# Altium PCB Advanced Clock.PcbDoc (part 7 of 7)
Units mil, origin at the board's own origin, x right, y up, seen from the top; angles counter-clockwise.
Board outline 3854 x 3880 mil, 2 copper layers (Top Layer, Bottom Layer); 117 components, 90 nets, 504 pads, 209 vias.
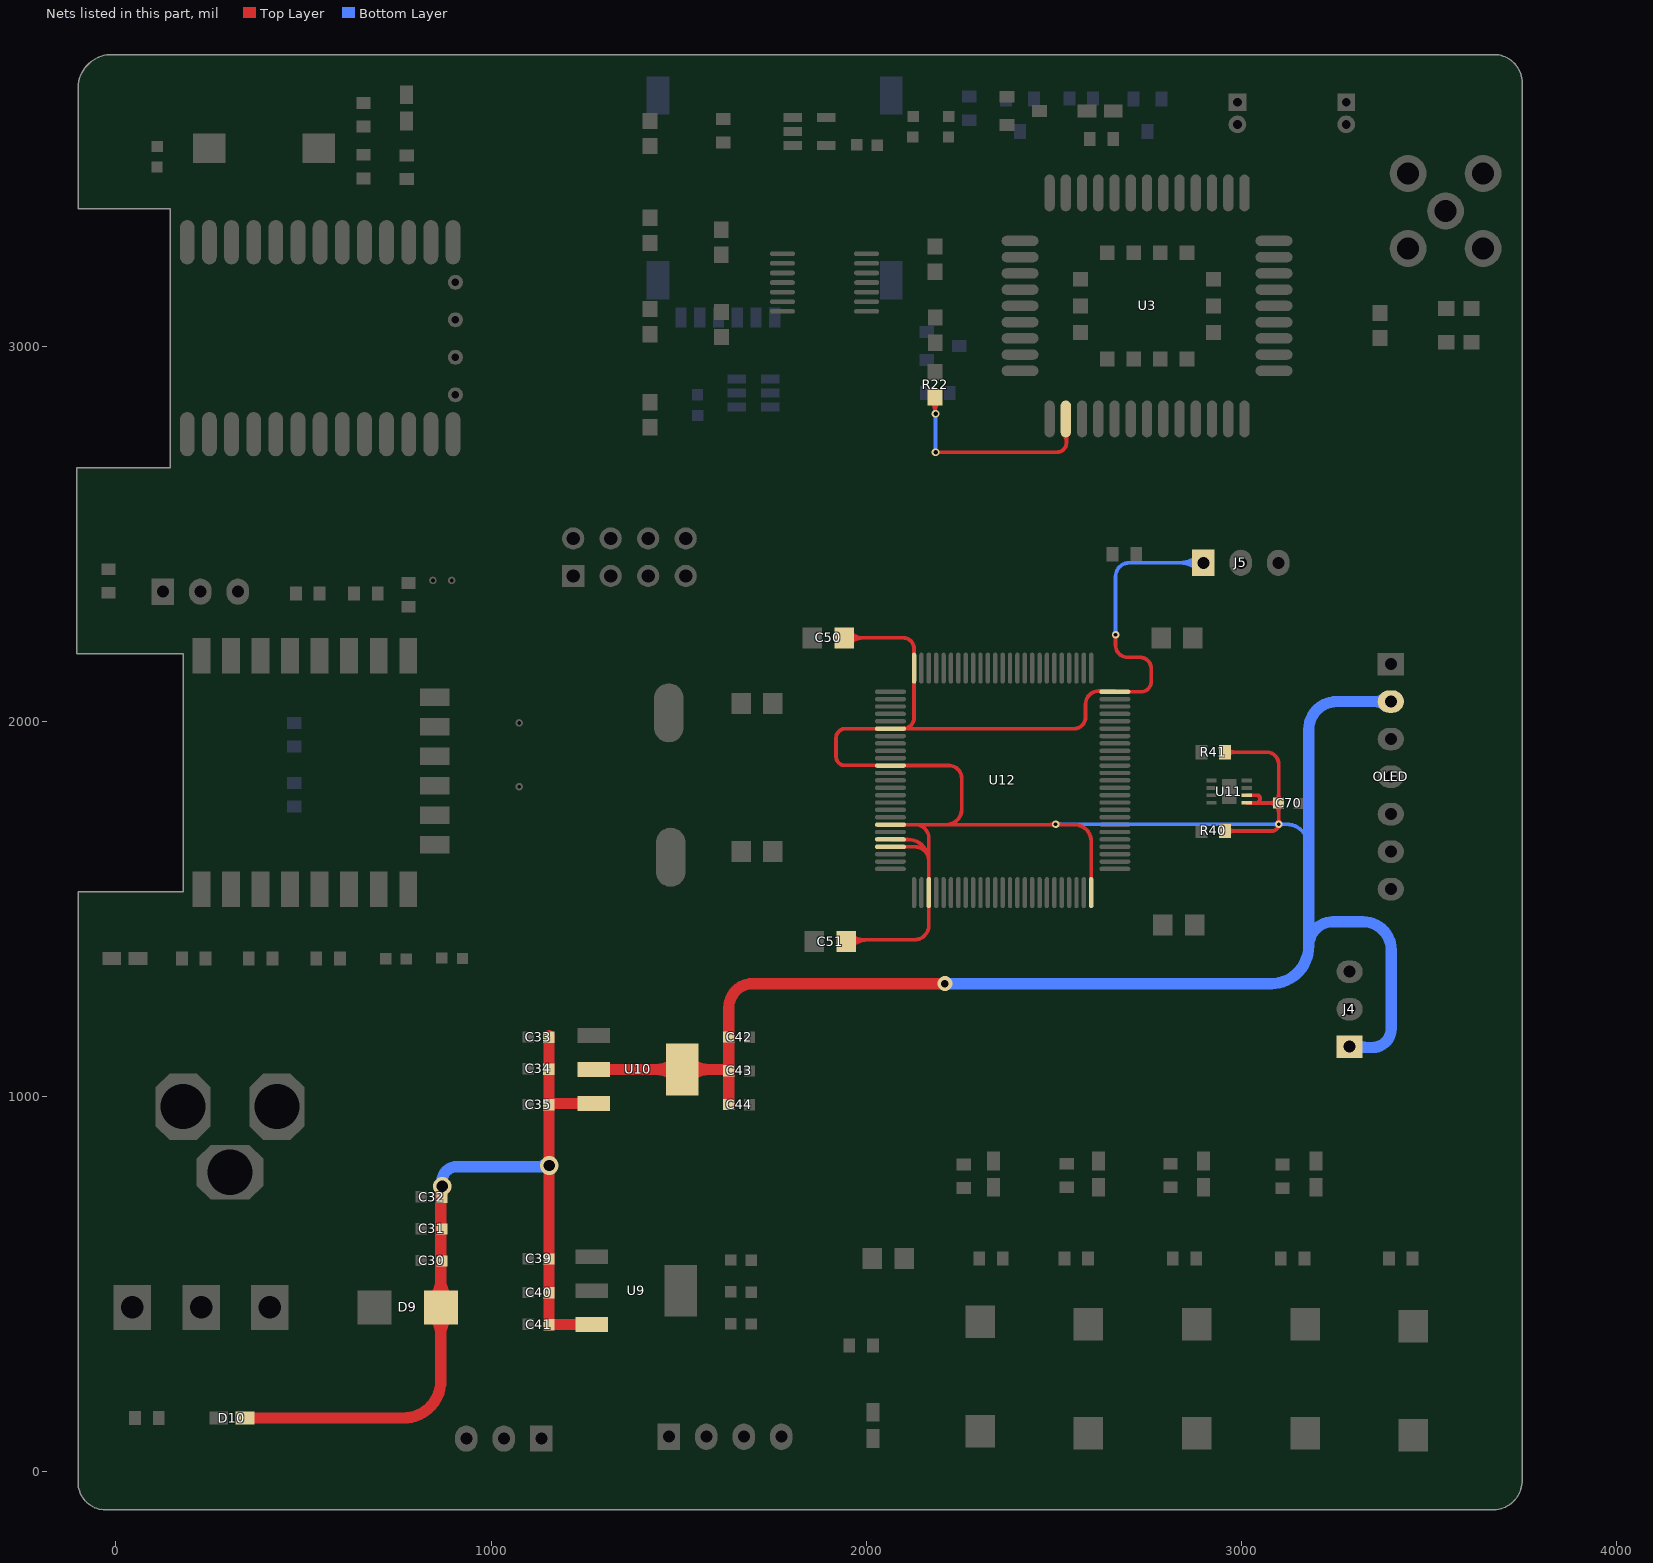
[diagram p7: the nets of this part, all layers, seen from the top]

## Via types
v1: diameter 20, hole 12, Top Layer to Bottom Layer, 133 vias
v2: diameter 20, hole 10, Top Layer to Bottom Layer, 30 vias
v3: diameter 15, hole 7, Top Layer to Bottom Layer, 26 vias
v4: diameter 30, hole 20, Top Layer to Bottom Layer, 11 vias
v5: diameter 138, hole 137.8, Top Layer to Bottom Layer, 4 vias
v6: diameter 50, hole 30, Top Layer to Bottom Layer, 4 vias
v7: diameter 40, hole 20, Top Layer to Bottom Layer, 1 vias

## Nets (pads, with @x,y where several pads share a name; then routed paths per layer and width w, separated by ;. In a path a pad name is that pad's centre, name@x,y a point inside that pad or via, vN(x,y) a via of type N, cw(c..) or ccw(c..) an arc to the next point about the centre after c; other vN are vias at no path point) (continued)
VCC3V3_2: C42.2 C43.2 C44.2 C50.1 C51.1 C70.2 J4.1 J5.1 OLED.2 R40.2 R41.2 U10.2 U10.4 U11.5 U11.6 U12.6 U12.11 U12.19 U12.21 U12.22 U12.28 U12.50 U12.75 U12.100 | length 15293.3
  Top Layer w10: C50.1@1941.5,2222 2099,2222 cw(c2099,2193.22) 2127.78,2193.22 U12.100@2127.78,2141.21 2127.78,2009.03 cw(c2098.54,2009.03) U12.6@2098.54,1979.8 ; C51.1@1951.5,1417 2129,1417 ccw(c2129,1455.15) 2167.15,1455.15 2167.15,1627.85 ; U12.22@2064.79,1664.83 2130.17,1664.83 cw(c2130.17,1627.85) 2167.15,1627.85 ; U12.21@2064.79,1684.52 2110.48,1684.52 cw(c2110.48,1627.85) 2167.15,1627.85 ; U12.19@2064.79,1723.89 2131.11,1723.89 ; U12.11@2064.79,1881.37 2220.84,1881.37 cw(c2220.84,1847.21) 2255,1847.21 2255,1765 cw(c2213.89,1765) 2213.89,1723.89 ; U12.11@2064.79,1882 1943,1882 cw(c1943,1905) 1920,1905 1920,1955 cw(c1944.8,1955) 1944.8,1979.8 U12.6@2064.79,1979.8 U12.6@2098.54,1979.8 ; U12.50@2600.22,1542.79 2600.22,1678.99 ccw(c2555.32,1678.99) 2555.32,1723.89 2131.11,1723.89 ; v2(2665,2230) 2665,2202.25 ccw(c2697.25,2202.25) 2697.25,2170 2730,2170 cw(c2730,2140) 2760,2140 2760,2105 cw(c2733.22,2105) 2733.22,2078.22 U12.75@2663.21,2078.22 ccw(c2661.43,2078.22) 2661.43,2080 2620,2080 ccw(c2620,2045) 2585,2045 2585,2010 cw(c2554.8,2010) 2554.8,1979.8 U12.6@2098.54,1979.8 ; R40.2@2956.99,1707 3082,1707 ccw(c3082,1725) v2(3100,1725) C70.2@3100,1779.43 ; R41.2@2956.99,1917 3068,1917 cw(c3068,1885) 3100,1885 C70.2@3100,1779.43 ; U11.5@3015.14,1782.38 3015.14,1781.79 3040,1781.79 ; U11.6@3015.14,1802.07 3042.93,1802.07 cw(c3042.93,1795) 3050,1795 3050,1791.79 cw(c3040,1791.79) 3040,1781.79 ; C50.1@1949.28,2214.22 cw(c1968.06,2195.44) 1968.06,2222 ; C50.1@1949.28,2214.22 cw(c1968.06,2195.44) 1968.06,2222 ; C50.1@1949.28,2214.22 cw(c1968.06,2195.44) 1968.06,2222 ; C50.1@1949.28,2214.22 cw(c1968.06,2195.44) 1968.06,2222 ; C50.1@1949.28,2214.22 cw(c1968.06,2195.44) 1968.06,2222 ; C50.1@1949.28,2229.78 ccw(c1968.06,2248.56) 1968.06,2222 ; C50.1@1949.28,2229.78 ccw(c1968.06,2248.56) 1968.06,2222 ; C50.1@1949.28,2229.78 ccw(c1968.06,2248.56) 1968.06,2222 ; C50.1@1949.28,2229.78 ccw(c1968.06,2248.56) 1968.06,2222 ; C50.1@1949.28,2229.78 ccw(c1968.06,2248.56) 1968.06,2222 ; C51.1@1954.28,1406.22 cw(c1980.3,1380.2) 1980.3,1417 ; C51.1@1954.28,1406.22 cw(c1980.3,1380.2) 1980.3,1417 ; C51.1@1954.28,1406.22 cw(c1980.3,1380.2) 1980.3,1417 ; C51.1@1954.28,1406.22 cw(c1980.3,1380.2) 1980.3,1417 ; C51.1@1954.28,1406.22 cw(c1980.3,1380.2) 1980.3,1417 ; C50.1@1956.35,2207.15 cw(c1992.2,2171.3) 1992.2,2222 ; C50.1@1956.35,2207.15 cw(c1992.2,2171.3) 1992.2,2222 ; C50.1@1956.35,2207.15 cw(c1992.2,2171.3) 1992.2,2222 ; C50.1@1956.35,2207.15 cw(c1992.2,2171.3) 1992.2,2222 ; C50.1@1956.35,2207.15 cw(c1992.2,2171.3) 1992.2,2222 ; C50.1@1956.35,2236.85 ccw(c1992.2,2272.7) 1992.2,2222 ; C50.1@1956.35,2236.85 ccw(c1992.2,2272.7) 1992.2,2222 ; C50.1@1956.35,2236.85 ccw(c1992.2,2272.7) 1992.2,2222 ; C50.1@1956.35,2236.85 ccw(c1992.2,2272.7) 1992.2,2222 ; C50.1@1956.35,2236.85 ccw(c1992.2,2272.7) 1992.2,2222 ; C51.1@1961.35,1399.15 cw(c2004.44,1356.06) 2004.44,1417 ; C51.1@1961.35,1399.15 cw(c2004.44,1356.06) 2004.44,1417 ; C51.1@1961.35,1399.15 cw(c2004.44,1356.06) 2004.44,1417 ; C51.1@1961.35,1399.15 cw(c2004.44,1356.06) 2004.44,1417 ; C51.1@1961.35,1399.15 cw(c2004.44,1356.06) 2004.44,1417 ; C51.1@1961.35,1428.85 ccw(c1989.96,1457.46) 1989.96,1417 ; C51.1@1961.35,1428.85 ccw(c1989.96,1457.46) 1989.96,1417 ; C51.1@1961.35,1428.85 ccw(c1989.96,1457.46) 1989.96,1417 ; C51.1@1961.35,1428.85 ccw(c1989.96,1457.46) 1989.96,1417 ; C51.1@1961.35,1428.85 ccw(c1989.96,1457.46) 1989.96,1417 ; 2131.11,1723.89 cw(c2131.11,1687.85) 2167.15,1687.85 2167.15,1627.85 ; 2490.25,1723.89 ccw(c2490.25,1739.75) v2@2501.46,1728.54 ; 2490.25,1723.89 ccw(c2490.25,1739.75) v2@2501.46,1728.54 ; 2490.25,1723.89 ccw(c2490.25,1739.75) v2@2501.46,1728.54 ; 2490.25,1723.89 ccw(c2490.25,1739.75) v2@2501.46,1728.54 ; 2490.25,1723.89 ccw(c2490.25,1739.75) v2@2501.46,1728.54 ; 2490.25,1723.89 ccw(c2490.25,1739.75) v2@2501.46,1728.54 ; 2490.25,1723.89 ccw(c2490.25,1739.75) v2@2501.46,1728.54 ; 2490.25,1723.89 ccw(c2490.25,1739.75) v2@2501.46,1728.54 ; v2@2508.54,1728.54 ccw(c2519.75,1739.75) 2519.75,1723.89 ; v2@2508.54,1728.54 ccw(c2519.75,1739.75) 2519.75,1723.89 ; v2@2508.54,1728.54 ccw(c2519.75,1739.75) 2519.75,1723.89 ; v2@2508.54,1728.54 ccw(c2519.75,1739.75) 2519.75,1723.89 ; v2@2508.54,1728.54 ccw(c2519.75,1739.75) 2519.75,1723.89 ; v2@2508.54,1728.54 ccw(c2519.75,1739.75) 2519.75,1723.89 ; v2@2508.54,1728.54 ccw(c2519.75,1739.75) 2519.75,1723.89 ; v2@2508.54,1728.54 ccw(c2519.75,1739.75) 2519.75,1723.89 ; v2@2661.46,2226.46 cw(c2652.93,2217.93) 2665,2217.93 ; v2@2661.46,2226.46 cw(c2652.93,2217.93) 2665,2217.93 ; v2@2661.46,2226.46 cw(c2652.93,2217.93) 2665,2217.93 ; v2@2661.46,2226.46 cw(c2652.93,2217.93) 2665,2217.93 ; v2@2661.46,2226.46 cw(c2652.93,2217.93) 2665,2217.93 ; v2@2661.46,2226.46 cw(c2652.93,2217.93) 2665,2217.93 ; v2@2661.46,2226.46 cw(c2652.93,2217.93) 2665,2217.93 ; v2@2661.46,2226.46 cw(c2652.93,2217.93) 2665,2217.93 ; 2665,2217.93 cw(c2677.07,2217.93) v2@2668.54,2226.46 ; 2665,2217.93 cw(c2677.07,2217.93) v2@2668.54,2226.46 ; 2665,2217.93 cw(c2677.07,2217.93) v2@2668.54,2226.46 ; 2665,2217.93 cw(c2677.07,2217.93) v2@2668.54,2226.46 ; 2665,2217.93 cw(c2677.07,2217.93) v2@2668.54,2226.46 ; 2665,2217.93 cw(c2677.07,2217.93) v2@2668.54,2226.46 ; 2665,2217.93 cw(c2677.07,2217.93) v2@2668.54,2226.46 ; 2665,2217.93 cw(c2677.07,2217.93) v2@2668.54,2226.46 ; R40.2@2964.59,1699.4 cw(c2982.94,1681.05) 2982.94,1707 ; R40.2@2964.59,1699.4 cw(c2982.94,1681.05) 2982.94,1707 ; R40.2@2964.59,1699.4 cw(c2982.94,1681.05) 2982.94,1707 ; R40.2@2964.59,1699.4 cw(c2982.94,1681.05) 2982.94,1707 ; R40.2@2964.59,1699.4 cw(c2982.94,1681.05) 2982.94,1707 ; R40.2@2964.59,1699.4 cw(c2982.94,1681.05) 2982.94,1707 ; R40.2@2964.59,1699.4 cw(c2982.94,1681.05) 2982.94,1707 ; R40.2@2964.59,1699.4 cw(c2982.94,1681.05) 2982.94,1707 ; R40.2@2964.59,1714.6 ccw(c2982.94,1732.95) 2982.94,1707 ; R40.2@2964.59,1714.6 ccw(c2982.94,1732.95) 2982.94,1707 ; R40.2@2964.59,1714.6 ccw(c2982.94,1732.95) 2982.94,1707 ; R40.2@2964.59,1714.6 ccw(c2982.94,1732.95) 2982.94,1707 ; R40.2@2964.59,1714.6 ccw(c2982.94,1732.95) 2982.94,1707 ; R40.2@2964.59,1714.6 ccw(c2982.94,1732.95) 2982.94,1707 ; R40.2@2964.59,1714.6 ccw(c2982.94,1732.95) 2982.94,1707 ; R40.2@2964.59,1714.6 ccw(c2982.94,1732.95) 2982.94,1707 ; R41.2@2964.59,1909.4 cw(c2982.94,1891.05) 2982.94,1917 ; R41.2@2964.59,1909.4 cw(c2982.94,1891.05) 2982.94,1917 ; R41.2@2964.59,1909.4 cw(c2982.94,1891.05) 2982.94,1917 ; R41.2@2964.59,1909.4 cw(c2982.94,1891.05) 2982.94,1917 ; R41.2@2964.59,1909.4 cw(c2982.94,1891.05) 2982.94,1917 ; R41.2@2964.59,1909.4 cw(c2982.94,1891.05) 2982.94,1917 ; R41.2@2964.59,1909.4 cw(c2982.94,1891.05) 2982.94,1917 ; R41.2@2964.59,1909.4 cw(c2982.94,1891.05) 2982.94,1917 ; R41.2@2964.59,1924.6 ccw(c2982.94,1942.95) 2982.94,1917 ; R41.2@2964.59,1924.6 ccw(c2982.94,1942.95) 2982.94,1917 ; R41.2@2964.59,1924.6 ccw(c2982.94,1942.95) 2982.94,1917 ; R41.2@2964.59,1924.6 ccw(c2982.94,1942.95) 2982.94,1917 ; R41.2@2964.59,1924.6 ccw(c2982.94,1942.95) 2982.94,1917 ; R41.2@2964.59,1924.6 ccw(c2982.94,1942.95) 2982.94,1917 ; R41.2@2964.59,1924.6 ccw(c2982.94,1942.95) 2982.94,1917 ; R41.2@2964.59,1924.6 ccw(c2982.94,1942.95) 2982.94,1917 ; 3040,1781.79 3097.65,1781.79 cw(c3097.65,1779.43) C70.2@3100,1779.43 ; 3074.6,1781.79 cw(c3074.6,1756.17) C70.2@3092.72,1774.28 ; 3074.6,1781.79 cw(c3074.6,1756.17) C70.2@3092.72,1774.28 ; 3074.6,1781.79 cw(c3074.6,1756.17) C70.2@3092.72,1774.28 ; 3074.6,1781.79 cw(c3074.6,1756.17) C70.2@3092.72,1774.28 ; 3074.6,1781.79 cw(c3074.6,1756.17) C70.2@3092.72,1774.28 ; 3074.6,1781.79 cw(c3074.6,1756.17) C70.2@3092.72,1774.28 ; 3074.6,1781.79 cw(c3074.6,1756.17) C70.2@3092.72,1774.28 ; 3074.6,1781.79 cw(c3074.6,1756.17) C70.2@3092.72,1774.28 ; 3076.69,1781.79 ccw(c3076.69,1804.45) C70.2@3092.72,1788.43 ; 3076.69,1781.79 ccw(c3076.69,1804.45) C70.2@3092.72,1788.43 ; 3076.69,1781.79 ccw(c3076.69,1804.45) C70.2@3092.72,1788.43 ; 3076.69,1781.79 ccw(c3076.69,1804.45) C70.2@3092.72,1788.43 ; 3076.69,1781.79 ccw(c3076.69,1804.45) C70.2@3092.72,1788.43 ; 3076.69,1781.79 ccw(c3076.69,1804.45) C70.2@3092.72,1788.43 ; 3076.69,1781.79 ccw(c3076.69,1804.45) C70.2@3092.72,1788.43 ; 3076.69,1781.79 ccw(c3076.69,1804.45) C70.2@3092.72,1788.43 ; C70.2@3092.72,1774.28 cw(c3075.13,1756.7) 3100,1756.7 ; C70.2@3092.72,1774.28 cw(c3075.13,1756.7) 3100,1756.7 ; C70.2@3092.72,1774.28 cw(c3075.13,1756.7) 3100,1756.7 ; C70.2@3092.72,1774.28 cw(c3075.13,1756.7) 3100,1756.7 ; C70.2@3092.72,1774.28 cw(c3075.13,1756.7) 3100,1756.7 ; C70.2@3092.72,1774.28 cw(c3075.13,1756.7) 3100,1756.7 ; C70.2@3092.72,1774.28 cw(c3075.13,1756.7) 3100,1756.7 ; C70.2@3092.72,1774.28 cw(c3075.13,1756.7) 3100,1756.7 ; C70.2@3092.72,1788.43 ccw(c3075.13,1806.01) 3100,1806.01 ; C70.2@3092.72,1788.43 ccw(c3075.13,1806.01) 3100,1806.01 ; C70.2@3092.72,1788.43 ccw(c3075.13,1806.01) 3100,1806.01 ; C70.2@3092.72,1788.43 ccw(c3075.13,1806.01) 3100,1806.01 ; C70.2@3092.72,1788.43 ccw(c3075.13,1806.01) 3100,1806.01 ; C70.2@3092.72,1788.43 ccw(c3075.13,1806.01) 3100,1806.01 ; C70.2@3092.72,1788.43 ccw(c3075.13,1806.01) 3100,1806.01 ; C70.2@3092.72,1788.43 ccw(c3075.13,1806.01) 3100,1806.01 ; v2@3096.46,1728.54 ccw(c3087.93,1737.07) 3100,1737.07 ; v2@3096.46,1728.54 ccw(c3087.93,1737.07) 3100,1737.07 ; v2@3096.46,1728.54 ccw(c3087.93,1737.07) 3100,1737.07 ; v2@3096.46,1728.54 ccw(c3087.93,1737.07) 3100,1737.07 ; v2@3096.46,1728.54 ccw(c3087.93,1737.07) 3100,1737.07 ; v2@3096.46,1728.54 ccw(c3087.93,1737.07) 3100,1737.07 ; v2@3096.46,1728.54 ccw(c3087.93,1737.07) 3100,1737.07 ; v2@3096.46,1728.54 ccw(c3087.93,1737.07) 3100,1737.07 ; 3100,1737.07 ccw(c3112.07,1737.07) v2@3103.54,1728.54 ; 3100,1737.07 ccw(c3112.07,1737.07) v2@3103.54,1728.54 ; 3100,1737.07 ccw(c3112.07,1737.07) v2@3103.54,1728.54 ; 3100,1737.07 ccw(c3112.07,1737.07) v2@3103.54,1728.54 ; 3100,1737.07 ccw(c3112.07,1737.07) v2@3103.54,1728.54 ; 3100,1737.07 ccw(c3112.07,1737.07) v2@3103.54,1728.54 ; 3100,1737.07 ccw(c3112.07,1737.07) v2@3103.54,1728.54 ; 3100,1737.07 ccw(c3112.07,1737.07) v2@3103.54,1728.54 ; 3100,1757.73 cw(c3123.42,1757.73) C70.2@3106.86,1774.28 ; 3100,1757.73 cw(c3123.42,1757.73) C70.2@3106.86,1774.28 ; 3100,1757.73 cw(c3123.42,1757.73) C70.2@3106.86,1774.28 ; 3100,1757.73 cw(c3123.42,1757.73) C70.2@3106.86,1774.28 ; 3100,1757.73 cw(c3123.42,1757.73) C70.2@3106.86,1774.28 ; 3100,1757.73 cw(c3123.42,1757.73) C70.2@3106.86,1774.28 ; 3100,1757.73 cw(c3123.42,1757.73) C70.2@3106.86,1774.28 ; 3100,1757.73 cw(c3123.42,1757.73) C70.2@3106.86,1774.28 ; 3100,1804.98 ccw(c3123.42,1804.98) C70.2@3106.86,1788.43 ; 3100,1804.98 ccw(c3123.42,1804.98) C70.2@3106.86,1788.43 ; 3100,1804.98 ccw(c3123.42,1804.98) C70.2@3106.86,1788.43 ; 3100,1804.98 ccw(c3123.42,1804.98) C70.2@3106.86,1788.43 ; 3100,1804.98 ccw(c3123.42,1804.98) C70.2@3106.86,1788.43 ; 3100,1804.98 ccw(c3123.42,1804.98) C70.2@3106.86,1788.43 ; 3100,1804.98 ccw(c3123.42,1804.98) C70.2@3106.86,1788.43 ; 3100,1804.98 ccw(c3123.42,1804.98) C70.2@3106.86,1788.43 ; 2621.3,2080 cw(c2621.3,2071.74) 2627.14,2077.58 ccw(c2621.3,2071.74) 2621.3,2080
  Top Layer w30: U10.2@1274.21,1071.09 1630.91,1071.09 cw(c1630.91,1068) C43.2@1634,1068 ; C44.2@1634,978 C43.2@1634,1068 ; v7(2210,1300) 1698,1300 ccw(c1698,1236) 1634,1236 C42.2@1634,1158 C43.2@1634,1068 ; 1442.09,1071.09 cw(c1442.09,1002.76) U10.4@1490.42,1051.08 ; 1442.09,1071.09 ccw(c1442.09,1139.43) U10.4@1490.42,1091.11 ; 1442.09,1071.09 cw(c1442.09,1002.76) U10.4@1490.42,1051.08 ; 1442.09,1071.09 ccw(c1442.09,1139.43) U10.4@1490.42,1091.11 ; 1442.09,1071.09 cw(c1442.09,1002.76) U10.4@1490.42,1051.08 ; 1442.09,1071.09 ccw(c1442.09,1139.43) U10.4@1490.42,1091.11 ; 1442.09,1071.09 cw(c1442.09,1002.76) U10.4@1490.42,1051.08 ; 1442.09,1071.09 ccw(c1442.09,1139.43) U10.4@1490.42,1091.11 ; U10.4@1530.45,1051.08 cw(c1578.77,1002.76) 1578.77,1071.09 ; U10.4@1530.45,1051.08 cw(c1578.77,1002.76) 1578.77,1071.09 ; U10.4@1530.45,1051.08 cw(c1578.77,1002.76) 1578.77,1071.09 ; U10.4@1530.45,1051.08 cw(c1578.77,1002.76) 1578.77,1071.09 ; U10.4@1530.45,1091.11 ccw(c1578.77,1139.43) 1578.77,1071.09 ; U10.4@1530.45,1091.11 ccw(c1578.77,1139.43) 1578.77,1071.09 ; U10.4@1530.45,1091.11 ccw(c1578.77,1139.43) 1578.77,1071.09 ; U10.4@1530.45,1091.11 ccw(c1578.77,1139.43) 1578.77,1071.09
  Bottom Layer w10: v2(2505,1725) v2(3100,1725) 3120,1725 cw(c3120,1665) 3180,1665 ; v2(2665,2230) 2665,2385 cw(c2702,2385) 2702,2422 J5.1@2899,2422 ; v2@2508.54,1721.46 cw(c2517.07,1712.93) 2517.07,1725 ; v2@2508.54,1721.46 cw(c2517.07,1712.93) 2517.07,1725 ; v2@2508.54,1721.46 cw(c2517.07,1712.93) 2517.07,1725 ; v2@2508.54,1721.46 cw(c2517.07,1712.93) 2517.07,1725 ; v2@2508.54,1721.46 cw(c2517.07,1712.93) 2517.07,1725 ; v2@2508.54,1721.46 cw(c2517.07,1712.93) 2517.07,1725 ; v2@2508.54,1721.46 cw(c2517.07,1712.93) 2517.07,1725 ; v2@2508.54,1721.46 cw(c2517.07,1712.93) 2517.07,1725 ; v2@2508.54,1728.54 ccw(c2517.07,1737.07) 2517.07,1725 ; v2@2508.54,1728.54 ccw(c2517.07,1737.07) 2517.07,1725 ; v2@2508.54,1728.54 ccw(c2517.07,1737.07) 2517.07,1725 ; v2@2508.54,1728.54 ccw(c2517.07,1737.07) 2517.07,1725 ; v2@2508.54,1728.54 ccw(c2517.07,1737.07) 2517.07,1725 ; v2@2508.54,1728.54 ccw(c2517.07,1737.07) 2517.07,1725 ; v2@2508.54,1728.54 ccw(c2517.07,1737.07) 2517.07,1725 ; v2@2508.54,1728.54 ccw(c2517.07,1737.07) 2517.07,1725 ; v2@2661.46,2233.54 ccw(c2652.93,2242.07) 2665,2242.07 ; v2@2661.46,2233.54 ccw(c2652.93,2242.07) 2665,2242.07 ; v2@2661.46,2233.54 ccw(c2652.93,2242.07) 2665,2242.07 ; v2@2661.46,2233.54 ccw(c2652.93,2242.07) 2665,2242.07 ; v2@2661.46,2233.54 ccw(c2652.93,2242.07) 2665,2242.07 ; v2@2661.46,2233.54 ccw(c2652.93,2242.07) 2665,2242.07 ; v2@2661.46,2233.54 ccw(c2652.93,2242.07) 2665,2242.07 ; v2@2661.46,2233.54 ccw(c2652.93,2242.07) 2665,2242.07 ; 2665,2242.07 ccw(c2677.07,2242.07) v2@2668.54,2233.54 ; 2665,2242.07 ccw(c2677.07,2242.07) v2@2668.54,2233.54 ; 2665,2242.07 ccw(c2677.07,2242.07) v2@2668.54,2233.54 ; 2665,2242.07 ccw(c2677.07,2242.07) v2@2668.54,2233.54 ; 2665,2242.07 ccw(c2677.07,2242.07) v2@2668.54,2233.54 ; 2665,2242.07 ccw(c2677.07,2242.07) v2@2668.54,2233.54 ; 2665,2242.07 ccw(c2677.07,2242.07) v2@2668.54,2233.54 ; 2665,2242.07 ccw(c2677.07,2242.07) v2@2668.54,2233.54 ; 2838.64,2422 ccw(c2838.64,2482.36) J5.1@2881.32,2439.68 ; 2838.64,2422 ccw(c2838.64,2482.36) J5.1@2881.32,2439.68 ; 2838.64,2422 ccw(c2838.64,2482.36) J5.1@2881.32,2439.68 ; 2838.64,2422 ccw(c2838.64,2482.36) J5.1@2881.32,2439.68 ; 2838.64,2422 cw(c2838.64,2361.64) J5.1@2881.32,2404.32 ; 2838.64,2422 ccw(c2838.64,2482.36) J5.1@2881.32,2439.68 ; 2838.64,2422 cw(c2838.64,2361.64) J5.1@2881.32,2404.32 ; 2838.64,2422 cw(c2838.64,2361.64) J5.1@2881.32,2404.32 ; 2838.64,2422 cw(c2838.64,2361.64) J5.1@2881.32,2404.32 ; 2838.64,2422 cw(c2838.64,2361.64) J5.1@2881.32,2404.32 ; 2862.79,2422 cw(c2862.79,2385.79) J5.1@2888.39,2411.39 ; 2862.79,2422 cw(c2862.79,2385.79) J5.1@2888.39,2411.39 ; 2862.79,2422 ccw(c2862.79,2458.21) J5.1@2888.39,2432.61 ; 2862.79,2422 cw(c2862.79,2385.79) J5.1@2888.39,2411.39 ; 2862.79,2422 ccw(c2862.79,2458.21) J5.1@2888.39,2432.61 ; 2862.79,2422 ccw(c2862.79,2458.21) J5.1@2888.39,2432.61 ; 2862.79,2422 ccw(c2862.79,2458.21) J5.1@2888.39,2432.61 ; 2862.79,2422 ccw(c2862.79,2458.21) J5.1@2888.39,2432.61 ; 2862.79,2422 cw(c2862.79,2385.79) J5.1@2888.39,2411.39 ; 2862.79,2422 cw(c2862.79,2385.79) J5.1@2888.39,2411.39 ; 3087.93,1725 cw(c3087.93,1712.93) v2@3096.46,1721.46 ; 3087.93,1725 ccw(c3087.93,1737.07) v2@3096.46,1728.54 ; 3087.93,1725 cw(c3087.93,1712.93) v2@3096.46,1721.46 ; 3087.93,1725 ccw(c3087.93,1737.07) v2@3096.46,1728.54 ; 3087.93,1725 cw(c3087.93,1712.93) v2@3096.46,1721.46 ; 3087.93,1725 ccw(c3087.93,1737.07) v2@3096.46,1728.54 ; 3087.93,1725 cw(c3087.93,1712.93) v2@3096.46,1721.46 ; 3087.93,1725 ccw(c3087.93,1737.07) v2@3096.46,1728.54 ; 3087.93,1725 cw(c3087.93,1712.93) v2@3096.46,1721.46 ; 3087.93,1725 ccw(c3087.93,1737.07) v2@3096.46,1728.54 ; 3087.93,1725 cw(c3087.93,1712.93) v2@3096.46,1721.46 ; 3087.93,1725 ccw(c3087.93,1737.07) v2@3096.46,1728.54 ; 3087.93,1725 cw(c3087.93,1712.93) v2@3096.46,1721.46 ; 3087.93,1725 ccw(c3087.93,1737.07) v2@3096.46,1728.54 ; 3087.93,1725 cw(c3087.93,1712.93) v2@3096.46,1721.46 ; 3087.93,1725 ccw(c3087.93,1737.07) v2@3096.46,1728.54 ; v2@3103.54,1721.46 cw(c3112.07,1712.93) 3112.07,1725 ; v2@3103.54,1721.46 cw(c3112.07,1712.93) 3112.07,1725 ; v2@3103.54,1721.46 cw(c3112.07,1712.93) 3112.07,1725 ; v2@3103.54,1721.46 cw(c3112.07,1712.93) 3112.07,1725 ; v2@3103.54,1721.46 cw(c3112.07,1712.93) 3112.07,1725 ; v2@3103.54,1721.46 cw(c3112.07,1712.93) 3112.07,1725 ; v2@3103.54,1721.46 cw(c3112.07,1712.93) 3112.07,1725 ; v2@3103.54,1721.46 cw(c3112.07,1712.93) 3112.07,1725 ; v2@3103.54,1728.54 ccw(c3112.07,1737.07) 3112.07,1725 ; v2@3103.54,1728.54 ccw(c3112.07,1737.07) 3112.07,1725 ; v2@3103.54,1728.54 ccw(c3112.07,1737.07) 3112.07,1725 ; v2@3103.54,1728.54 ccw(c3112.07,1737.07) 3112.07,1725 ; v2@3103.54,1728.54 ccw(c3112.07,1737.07) 3112.07,1725 ; v2@3103.54,1728.54 ccw(c3112.07,1737.07) 3112.07,1725 ; v2@3103.54,1728.54 ccw(c3112.07,1737.07) 3112.07,1725 ; v2@3103.54,1728.54 ccw(c3112.07,1737.07) 3112.07,1725
  Bottom Layer w30: v7(2210,1300) 3080,1300 ccw(c3080,1400) 3180,1400 ; J4.1@3289,1132 ccw(c3291,1132) 3291,1130 3350,1130 ccw(c3350,1180) 3400,1180 3400,1390 ccw(c3325,1390) 3325,1465 3245,1465 ccw(c3245,1400) 3180,1400 ; OLED.2@3399,2052 3255,2052 ccw(c3255,1977) 3180,1977 3180,1665 3180,1400 ; J4.1@3304.61,1121.39 cw(c3325.38,1100.62) 3325.38,1130 ; J4.1@3304.61,1121.39 cw(c3325.38,1100.62) 3325.38,1130 ; J4.1@3304.61,1121.39 cw(c3325.38,1100.62) 3325.38,1130 ; J4.1@3304.61,1121.39 cw(c3325.38,1100.62) 3325.38,1130 ; J4.1@3304.61,1121.39 cw(c3325.38,1100.62) 3325.38,1130 ; J4.1@3304.61,1121.39 cw(c3325.38,1100.62) 3325.38,1130 ; J4.1@3304.61,1121.39 cw(c3325.38,1100.62) 3325.38,1130 ; J4.1@3304.61,1121.39 cw(c3325.38,1100.62) 3325.38,1130 ; J4.1@3304.61,1142.61 ccw(c3335.04,1173.04) 3335.04,1130 ; J4.1@3304.61,1142.61 ccw(c3335.04,1173.04) 3335.04,1130 ; J4.1@3304.61,1142.61 ccw(c3335.04,1173.04) 3335.04,1130 ; J4.1@3304.61,1142.61 ccw(c3335.04,1173.04) 3335.04,1130 ; J4.1@3304.61,1142.61 ccw(c3335.04,1173.04) 3335.04,1130 ; J4.1@3304.61,1142.61 ccw(c3335.04,1173.04) 3335.04,1130 ; J4.1@3304.61,1142.61 ccw(c3335.04,1173.04) 3335.04,1130 ; J4.1@3304.61,1142.61 ccw(c3335.04,1173.04) 3335.04,1130 ; 3357.79,2052 ccw(c3357.79,2088.21) OLED.2@3383.39,2062.61 ; 3357.79,2052 ccw(c3357.79,2088.21) OLED.2@3383.39,2062.61 ; 3357.79,2052 ccw(c3357.79,2088.21) OLED.2@3383.39,2062.61 ; 3357.79,2052 ccw(c3357.79,2088.21) OLED.2@3383.39,2062.61 ; 3357.79,2052 ccw(c3357.79,2088.21) OLED.2@3383.39,2062.61 ; 3357.79,2052 cw(c3357.79,2015.79) OLED.2@3383.39,2041.39 ; 3357.79,2052 cw(c3357.79,2015.79) OLED.2@3383.39,2041.39 ; 3357.79,2052 cw(c3357.79,2015.79) OLED.2@3383.39,2041.39 ; 3357.79,2052 cw(c3357.79,2015.79) OLED.2@3383.39,2041.39 ; 3357.79,2052 cw(c3357.79,2015.79) OLED.2@3383.39,2041.39
VCC5: C30.2 C31.2 C32.2 C33.2 C34.2 C35.2 C39.2 C40.2 C41.2 D9.2 D10.A U9.3 U10.3 | length 4419.6
  Top Layer w30: D10.A@344,141.74 766.17,141.74 ccw(c766.17,241.74) 866.17,241.74 D9.2@866.17,437 866.17,734.83 C32.2@864,737 ; C35.2@1154,977 cw(c1157.54,977) C35.2@1154.21,978.21 ; C41.2@1154.21,390.65 C41.2@1154.21,390.9 ; C33.2@1154.21,1162 C35.2@1154.21,978.21 ; U9.3@1269,390.9 C41.2@1154.21,390.9 ; U10.3@1269.46,985.29 cw(c1269.46,980.54) U10.3@1274.21,980.54 C35.2@1157.54,980.54 ; D9.2@844.76,415.59 cw(c793.07,363.91) 866.17,363.91 ; D9.2@844.76,415.59 cw(c793.07,363.91) 866.17,363.91 ; D9.2@844.76,415.59 cw(c793.07,363.91) 866.17,363.91 ; D9.2@844.76,415.59 cw(c793.07,363.91) 866.17,363.91 ; D9.2@844.76,415.59 cw(c793.07,363.91) 866.17,363.91 ; D9.2@844.76,458.41 ccw(c793.07,510.09) 866.17,510.09 ; D9.2@844.76,458.41 ccw(c793.07,510.09) 866.17,510.09 ; D9.2@844.76,458.41 ccw(c793.07,510.09) 866.17,510.09 ; D9.2@844.76,458.41 ccw(c793.07,510.09) 866.17,510.09 ; D9.2@844.76,458.41 ccw(c793.07,510.09) 866.17,510.09 ; 866.17,363.91 cw(c939.26,363.91) D9.2@887.57,415.59 ; 866.17,363.91 cw(c939.26,363.91) D9.2@887.57,415.59 ; 866.17,363.91 cw(c939.26,363.91) D9.2@887.57,415.59 ; 866.17,363.91 cw(c939.26,363.91) D9.2@887.57,415.59 ; 866.17,363.91 cw(c939.26,363.91) D9.2@887.57,415.59 ; 866.17,510.09 ccw(c939.26,510.09) D9.2@887.57,458.41 ; 866.17,510.09 ccw(c939.26,510.09) D9.2@887.57,458.41 ; 866.17,510.09 ccw(c939.26,510.09) D9.2@887.57,458.41 ; 866.17,510.09 ccw(c939.26,510.09) D9.2@887.57,458.41 ; 866.17,510.09 ccw(c939.26,510.09) D9.2@887.57,458.41 ; C32.2@866.17,726.6 cw(c903.4,726.6) v6@877.07,752.93 ; C32.2@866.17,726.6 cw(c903.4,726.6) v6@877.07,752.93 ; C32.2@866.17,726.6 cw(c903.4,726.6) v6@877.07,752.93 ; C32.2@866.17,726.6 cw(c903.4,726.6) v6@877.07,752.93 ; C32.2@866.17,726.6 cw(c903.4,726.6) v6@877.07,752.93 ; C32.2@866.17,726.6 cw(c903.4,726.6) v6@877.07,752.93 ; C32.2@866.17,726.6 cw(c903.4,726.6) v6@877.07,752.93 ; C32.2@866.17,726.6 cw(c903.4,726.6) v6@877.07,752.93 ; C32.2@866.17,734.54 cw(c886.5,734.54) v6@875.44,751.61 ; C32.2@866.17,734.54 cw(c886.5,734.54) v6@875.44,751.61 ; C32.2@866.17,734.54 cw(c886.5,734.54) v6@875.44,751.61 ; C32.2@866.17,734.54 cw(c886.5,734.54) v6@875.44,751.61 ; C32.2@866.17,734.54 cw(c886.5,734.54) v6@875.44,751.61 ; C32.2@866.17,734.54 cw(c886.5,734.54) v6@875.44,751.61 ; C32.2@866.17,734.54 cw(c886.5,734.54) v6@875.44,751.61 ; C32.2@866.17,734.54 cw(c886.5,734.54) v6@875.44,751.61 ; C41.2@1154.21,390.9 C40.2@1154.21,475.65 C39.2@1154.21,565.65 C35.2@1154.21,978.21 ; 1154.21,788.96 cw(c1181.04,788.96) v6@1162.07,807.93 ; 1154.21,788.96 cw(c1181.04,788.96) v6@1162.07,807.93 ; 1154.21,788.96 cw(c1181.04,788.96) v6@1162.07,807.93 ; 1154.21,788.96 cw(c1181.04,788.96) v6@1162.07,807.93 ; 1154.21,788.96 cw(c1181.04,788.96) v6@1162.07,807.93 ; 1154.21,788.96 cw(c1181.04,788.96) v6@1162.07,807.93 ; 1154.21,788.96 cw(c1181.04,788.96) v6@1162.07,807.93 ; 1154.21,788.96 cw(c1181.04,788.96) v6@1162.07,807.93 ; 1154.21,841.04 ccw(c1181.04,841.04) v6@1162.07,822.07 ; 1154.21,841.04 ccw(c1181.04,841.04) v6@1162.07,822.07 ; 1154.21,841.04 ccw(c1181.04,841.04) v6@1162.07,822.07 ; 1154.21,841.04 ccw(c1181.04,841.04) v6@1162.07,822.07 ; 1154.21,841.04 ccw(c1181.04,841.04) v6@1162.07,822.07 ; 1154.21,841.04 ccw(c1181.04,841.04) v6@1162.07,822.07 ; 1154.21,841.04 ccw(c1181.04,841.04) v6@1162.07,822.07 ; 1154.21,841.04 ccw(c1181.04,841.04) v6@1162.07,822.07 ; C35.2@1154.21,978.21 cw(c1157.54,977) C35.2@1157.54,980.54 ; C35.2@1154.21,978.21 cw(c1157.54,977) C35.2@1157.54,980.54
  Bottom Layer w30: v6@869,772 cw(c909,772) 909,812 v6@1154,812 ; 1123.62,812 ccw(c1123.62,846.38) v6@1147.93,822.07 ; 1123.62,812 ccw(c1123.62,846.38) v6@1147.93,822.07 ; 1123.62,812 ccw(c1123.62,846.38) v6@1147.93,822.07 ; 1123.62,812 ccw(c1123.62,846.38) v6@1147.93,822.07 ; 1123.62,812 ccw(c1123.62,846.38) v6@1147.93,822.07
  other v6: 870,760 1155,815
VDD_EXT: R22.1 U3.24 | length 975.9
  Top Layer w10: v1(2185,2717) 2509,2717 ccw(c2509,2742) 2534,2742 2534,2804.28 ccw(c2532.46,2804.28) U3.24@2532.46,2805.82 ; R22.1@2173.44,2850.9 cw(c2148.37,2825.83) v1@2183.83,2825.83 ; R22.1@2173.44,2850.9 cw(c2148.37,2825.83) v1@2183.83,2825.83 ; R22.1@2173.44,2850.9 cw(c2148.37,2825.83) v1@2183.83,2825.83 ; R22.1@2173.44,2850.9 cw(c2148.37,2825.83) v1@2183.83,2825.83 ; R22.1@2173.44,2850.9 cw(c2148.37,2825.83) v1@2183.83,2825.83 ; v1@2183.83,2825.83 cw(c2219.28,2825.83) R22.1@2194.21,2850.9 ; v1@2183.83,2825.83 cw(c2219.28,2825.83) R22.1@2194.21,2850.9 ; v1@2183.83,2825.83 cw(c2219.28,2825.83) R22.1@2194.21,2850.9 ; v1@2183.83,2825.83 cw(c2219.28,2825.83) R22.1@2194.21,2850.9 ; v1@2183.83,2825.83 cw(c2219.28,2825.83) R22.1@2194.21,2850.9 ; U3.24@2526.26,2764.18 cw(c2507.56,2745.48) 2534,2745.48 ; U3.24@2526.26,2764.18 cw(c2507.56,2745.48) 2534,2745.48 ; U3.24@2526.26,2764.18 cw(c2507.56,2745.48) 2534,2745.48 ; U3.24@2526.26,2764.18 cw(c2507.56,2745.48) 2534,2745.48 ; U3.24@2526.26,2764.18 cw(c2507.56,2745.48) 2534,2745.48 ; 2534,2752.9 cw(c2549.95,2752.9) U3.24@2538.67,2764.18 ; 2534,2752.9 cw(c2549.95,2752.9) U3.24@2538.67,2764.18 ; 2534,2752.9 cw(c2549.95,2752.9) U3.24@2538.67,2764.18 ; 2534,2752.9 cw(c2549.95,2752.9) U3.24@2538.67,2764.18 ; 2534,2752.9 cw(c2549.95,2752.9) U3.24@2538.67,2764.18
  Bottom Layer w10: v1(2185,2717) v1(2185,2820)
pads on no net: S1.1 SIM1.6 U3.2 U3.3 U3.4 U3.5 U3.6 U3.8 U3.9 U3.10 U3.21 U3.22 U3.23 U3.25 U3.26 U3.28 U3.29 U3.30 U3.31 U3.32 U3.33 U3.38 U3.39 U3.40 U3.45 U3.46 U3.47 U3.48 U3.49 U3.50 U3.51 U3.52 U3.53 U3.54 U3.55 U3.56 U3.57 U3.58 U4.1 U5.4 U5.5 U5.6 U5.9 U5.10 U5.11 U7.3 U7.4 U7.5 U7.6 U7.7 U7.8 U7.9 U7.10 U7.11 U7.14 U7.15 U7.17 U7.19 U7.20 U7.21 U7.22 U7.23 U7.24 U7.25 U7.26 U7.27 U7.28 U7.29 U7.30 U11.3 U12.1 U12.2 U12.3 U12.4 U12.5 U12.7 U12.8 U12.9 U12.15 U12.16 U12.17 U12.18 U12.29 U12.30 U12.31 U12.32 U12.38 U12.39 U12.40 U12.41 U12.46 U12.47 U12.51 U12.55 U12.56 U12.57 U12.58 U12.59 U12.61 U12.62 U12.64 U12.65 U12.66 U12.67 U12.70 U12.71 U12.77 U12.80 U12.84 U12.85 U12.86 U12.87 U12.88 U12.92 U12.97 U12.98 U13.3 U13.5 U13.6 U13.10 U13.12 U13.13 U13.14 U13.15 U13.17 U13.18 U13.19 U13.20 U13.21 U13.22
copper on no net:
  other v4: 2720,1025 2840,1025 2950,1025 3070,1025 2720,1135 2840,1135 2950,1135 3070,1135
  other v5: 0,0 3655,0 0,3675 3655,3675

## Polygon pours and split planes (outlines as drawn)
GND on Bottom Layer "Top Layer-No Net" (solid, remove dead copper, pour order 4): -100,3780 -100,-100 3745,-100 3750,-105 3750,3775 -100,3775
GND on Top Layer "Top Layer-No Net" (solid, remove dead copper, pour order 6): -100,3780 -100,-105 3750,-105 3750,3775

## Keep-outs
Keep-Out Layer:
  the board outline again, w7.87

## Other copper
Top Layer:
  pour cut-out: 3050,2677.5 3050,2580 3400,2580 3400,2680 3335,2680
  pour cut-out: 3395,2980 3480,2980 3485,2975 3485,2575 3395,2575
  pour cut-out: 2440,3380 3055,3380 3055,2830 2445,2830
  pour cut-out: 3495,3370 3495,3120 3600,3120 3600,3310 3599.97,3310.03 3599.97,3337.23 3595,3342.2 3595,3370
  pour cut-out: 2970.54,2759.46 3047.14,2759.46 3050,2762.33 3050,2592.67 3010,2592.33 2970,2592.33
  pour cut-out: 3245,3085 3330,3085 3335,3080 3335,2680 3245,2680

## Silkscreen, mask and mechanical layers (free items; w line width, h text height)
Top Overlay:
  lines w7.87: 1029,3772 1029,2337 1709,2337 1709,3772 ; 3394,947 3504,947 3504,2767 ; 3399,1552 3399,947 1844,947 1844,2767 3399,2767 3501,2767 ; 3399,2152 3399,2765
  text "NB-IOT" at 2575,3050 h120
  text "NRF24L01" at 1265,3010 h120 r90
  text "BlueTooth" at 265,2980 h120
  text "BOOT0" at 2952,2322 h40
  text "VCC" at 3076,2320 h50
  text "GND" at 2853,2318 h50
  text "GND" at 3525,2130 h60
  text "VCC" at 3525,2030 h60
  text "SCK" at 3525,1935 h60
  text "MOSI" at 3525,1835 h60
  text "WIFI" at 385,1830 h120
  text "F4" at 2277,1783 h150
  text "RES" at 3525,1735 h60
  text "MISO" at 3525,1630 h60
  text "CS" at 3525,1530 h60
  text "GND" at 3135,1320 h40
  text "BOOT1" at 3125,1220 h40
  text "VCC" at 3140,1110 h40
  text "KEY5" at 3400,-29.37 h50
  text "RST" at 2260,-29.76 h50
  text "KEY2" at 2545,-30 h50
  text "KEY3" at 2830,-29.8 h50
  text "KEY4" at 3105,-29.76 h50
  text "RX" at 910,-45.47 h60
  text "TX" at 1005,-45 h60
  text "GND" at 1095,-45 h60
  text "CLK" at 1425,-45 h60
  text "DIO" at 1535,-45 h60
  text "GND" at 1640,-45 h60
  text "VCC" at 1750,-45 h60
Bottom Overlay:
  text "Advanced Clock" at 3327,741 h300
  text "ZGQ---张一西" at 3121,356 h300